# Altium PCB hdb44_passthorugh.PcbDoc
Units mm, origin at the board's own origin, x right, y up, seen from the top; angles counter-clockwise.
Board outline 52.14 x 63.25 mm, 4 copper layers (Top Layer, Int1 (GND), Int2 (GND), Bottom Layer), stack 0.5 mm thick; 46 components, 89 nets, 180 pads, 0 vias.
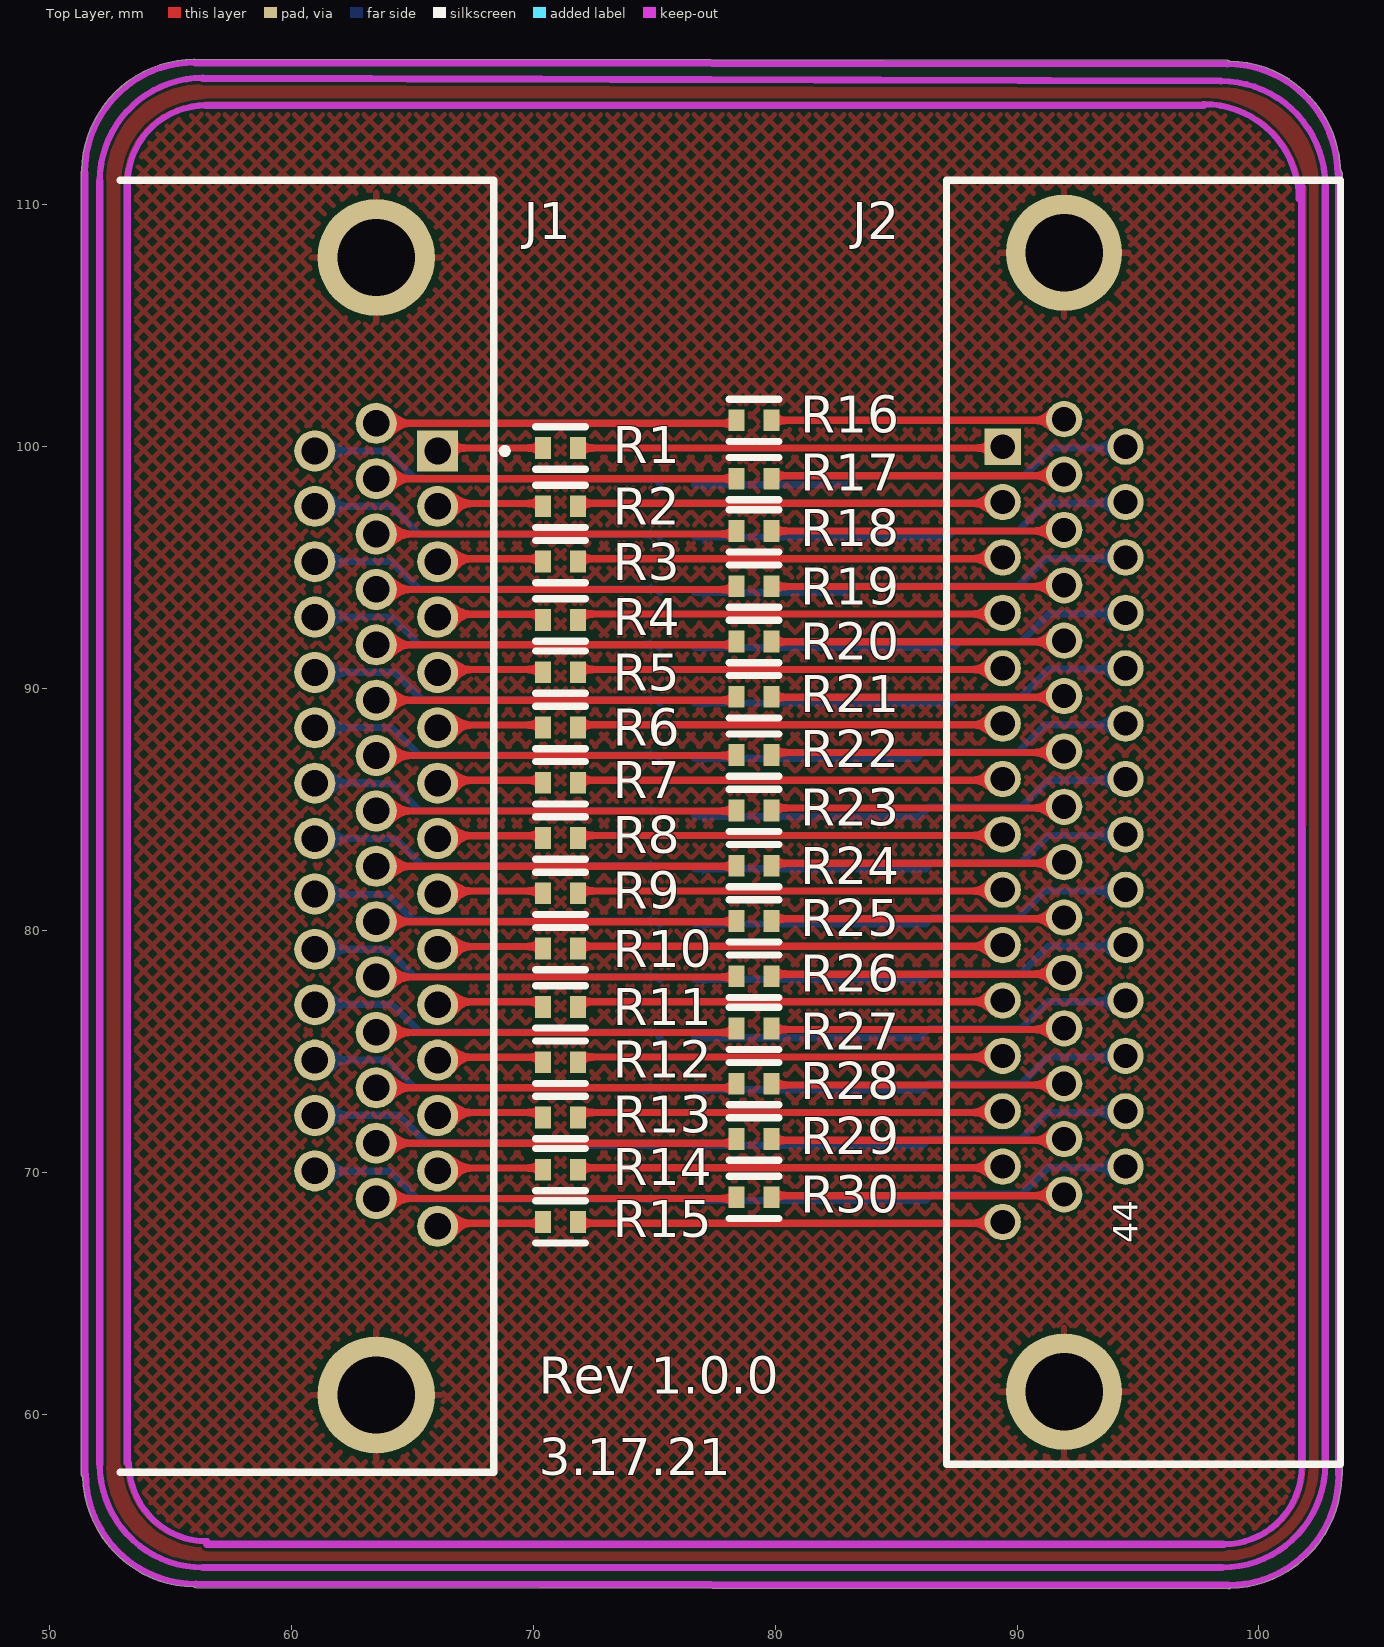
[diagram p0: Top Layer view]
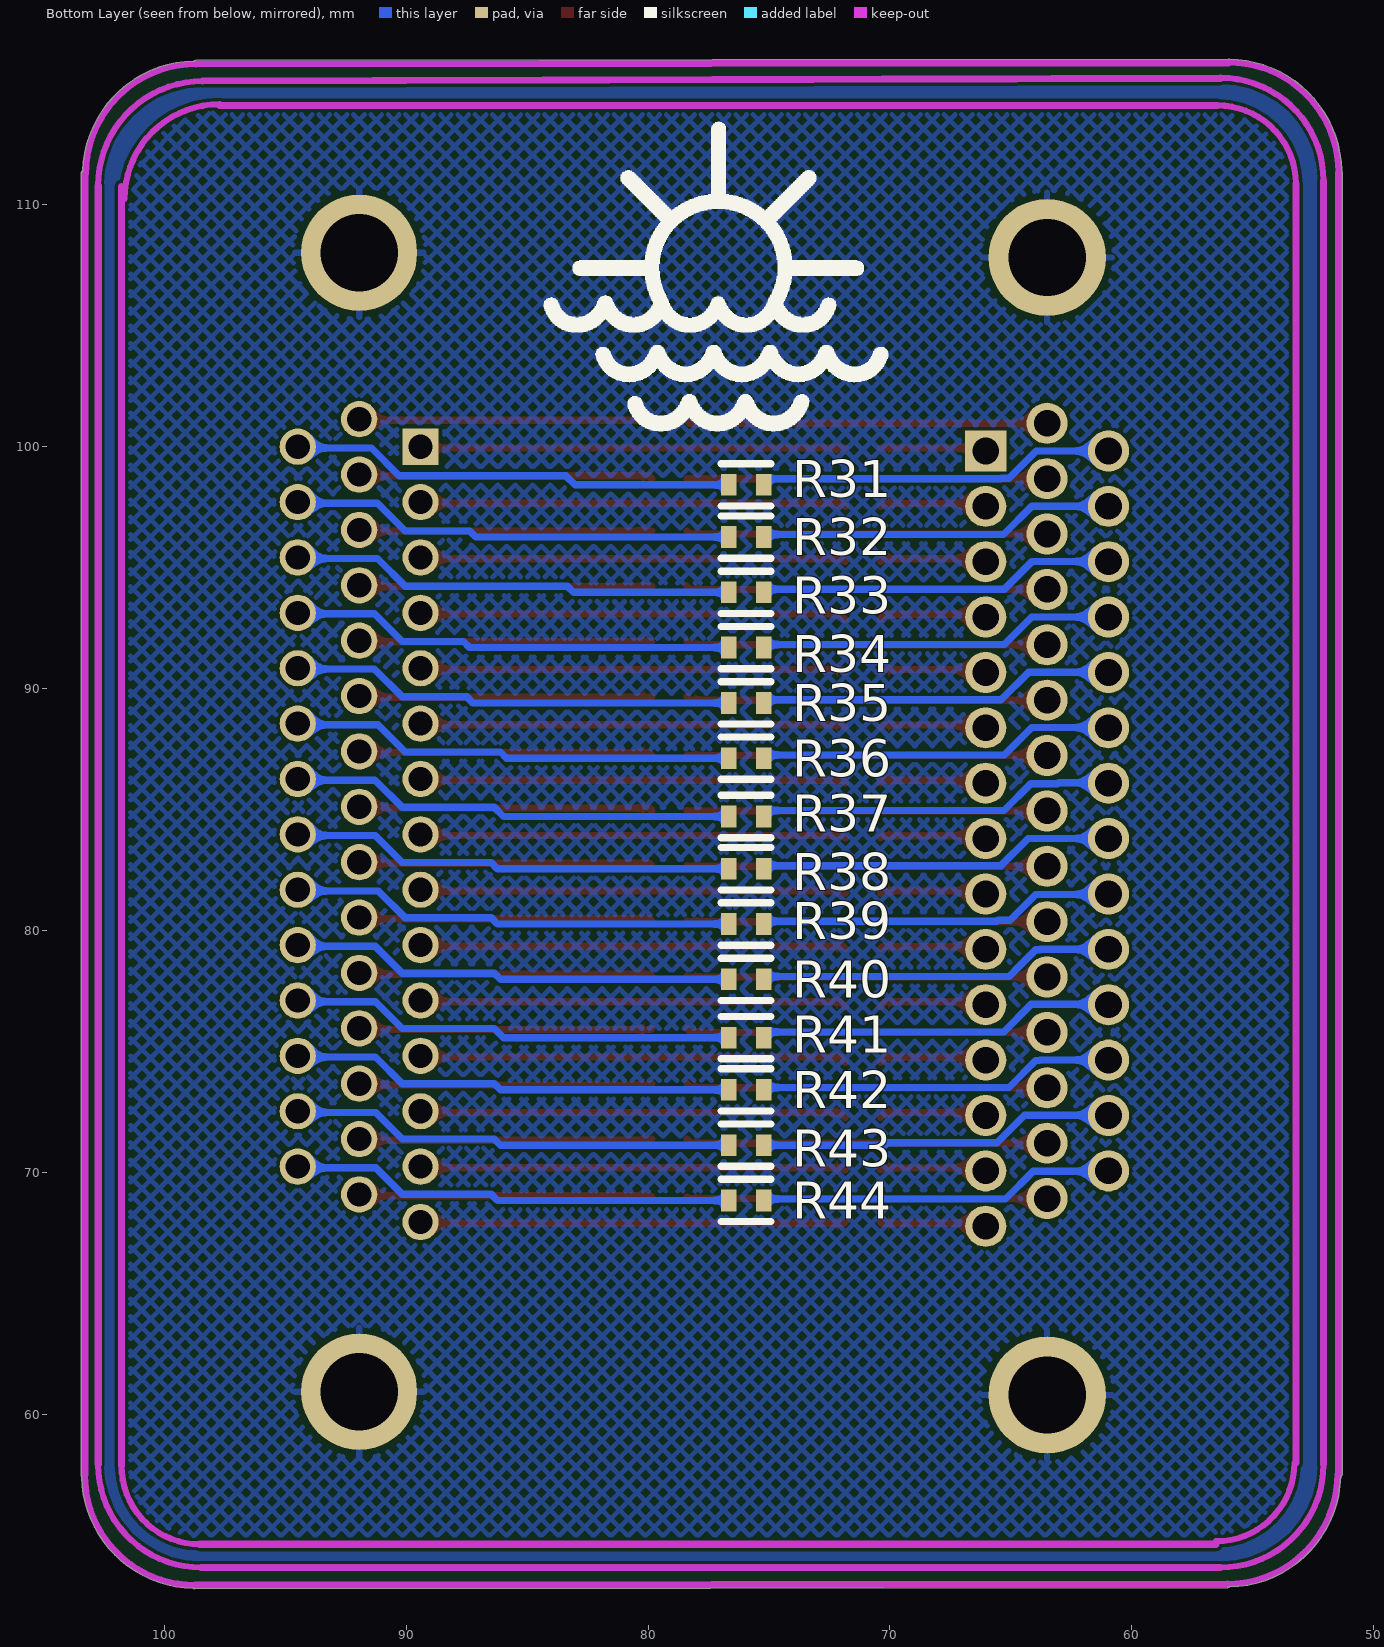
[diagram p1: Bottom Layer view, seen from below]
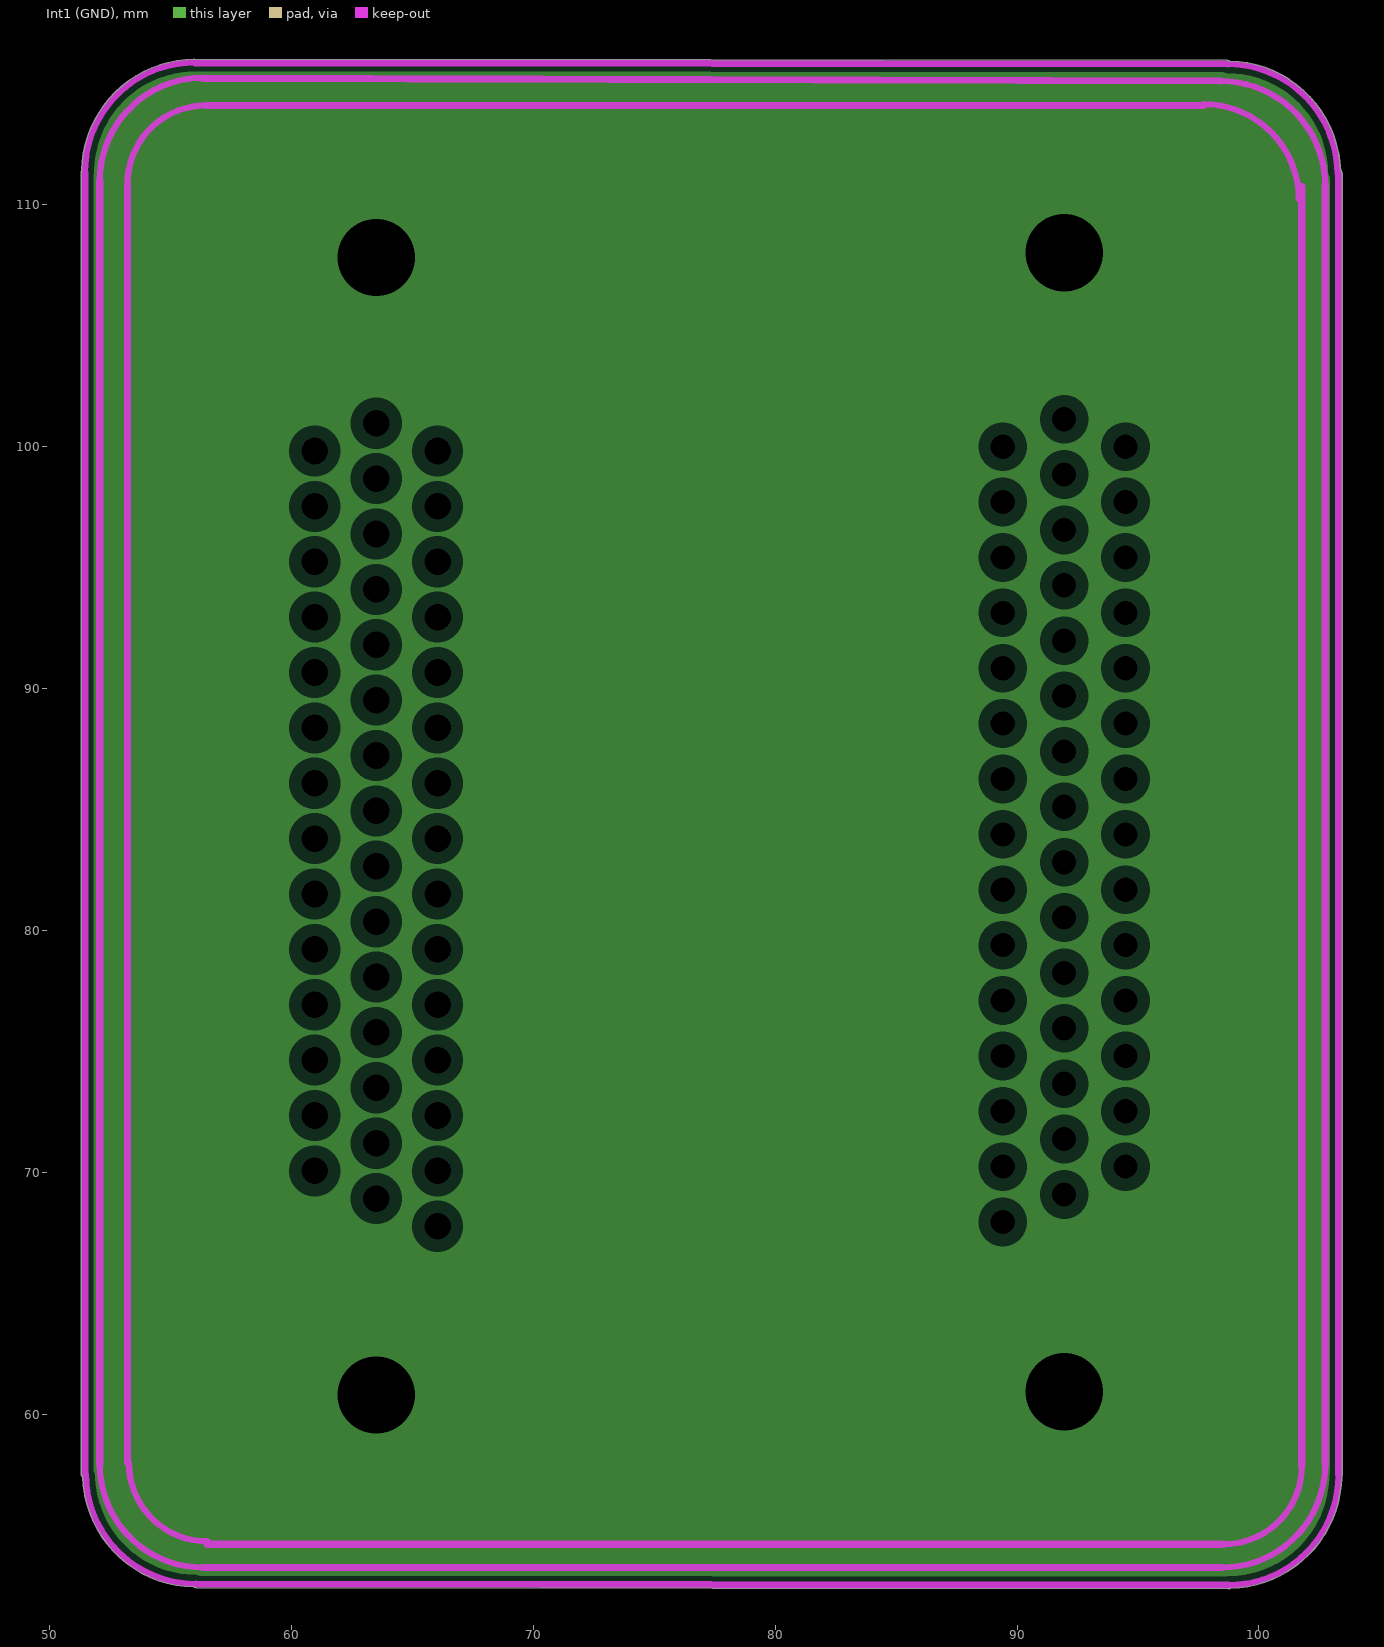
[diagram p2: Int1 (GND), clearances drawn from the general rule]
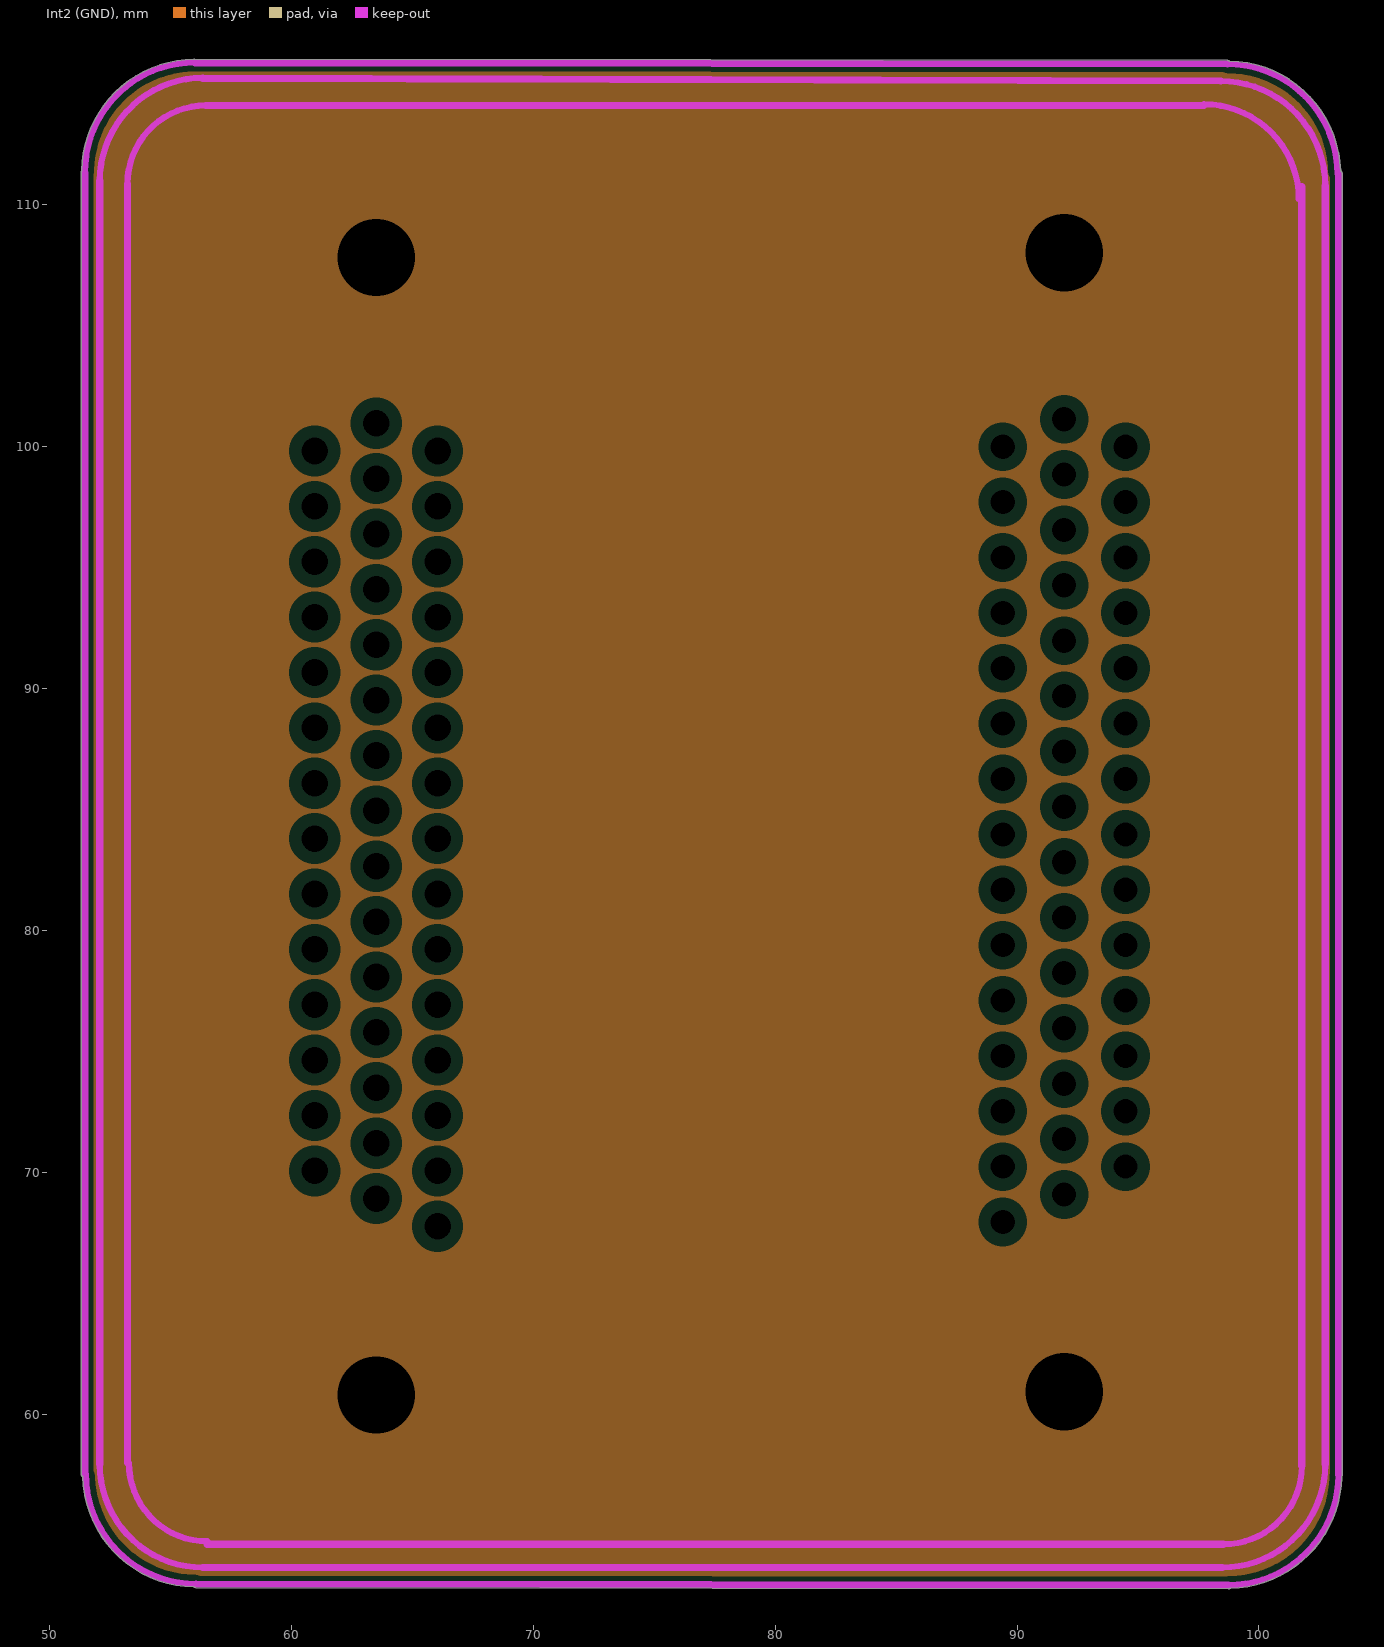
[diagram p3: Int2 (GND), clearances drawn from the general rule]
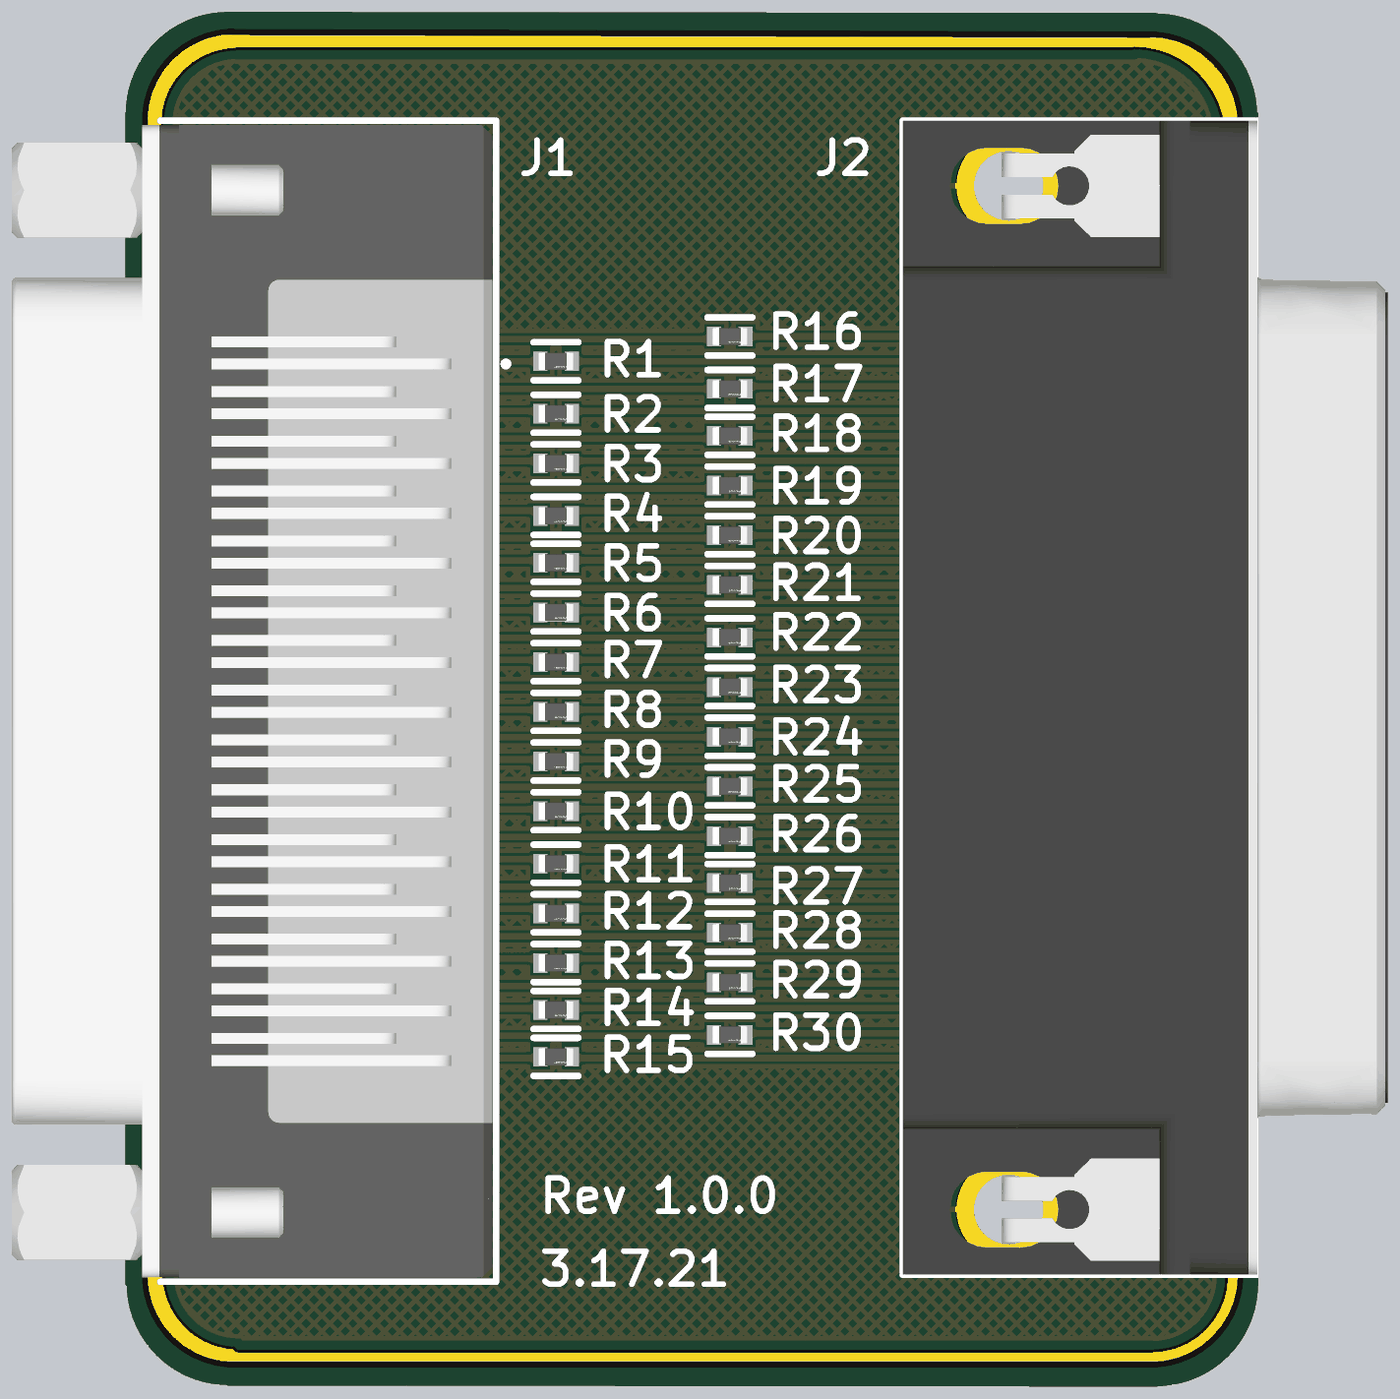
[diagram p4: 3D render of the assembled board from above, using the file's embedded part models]
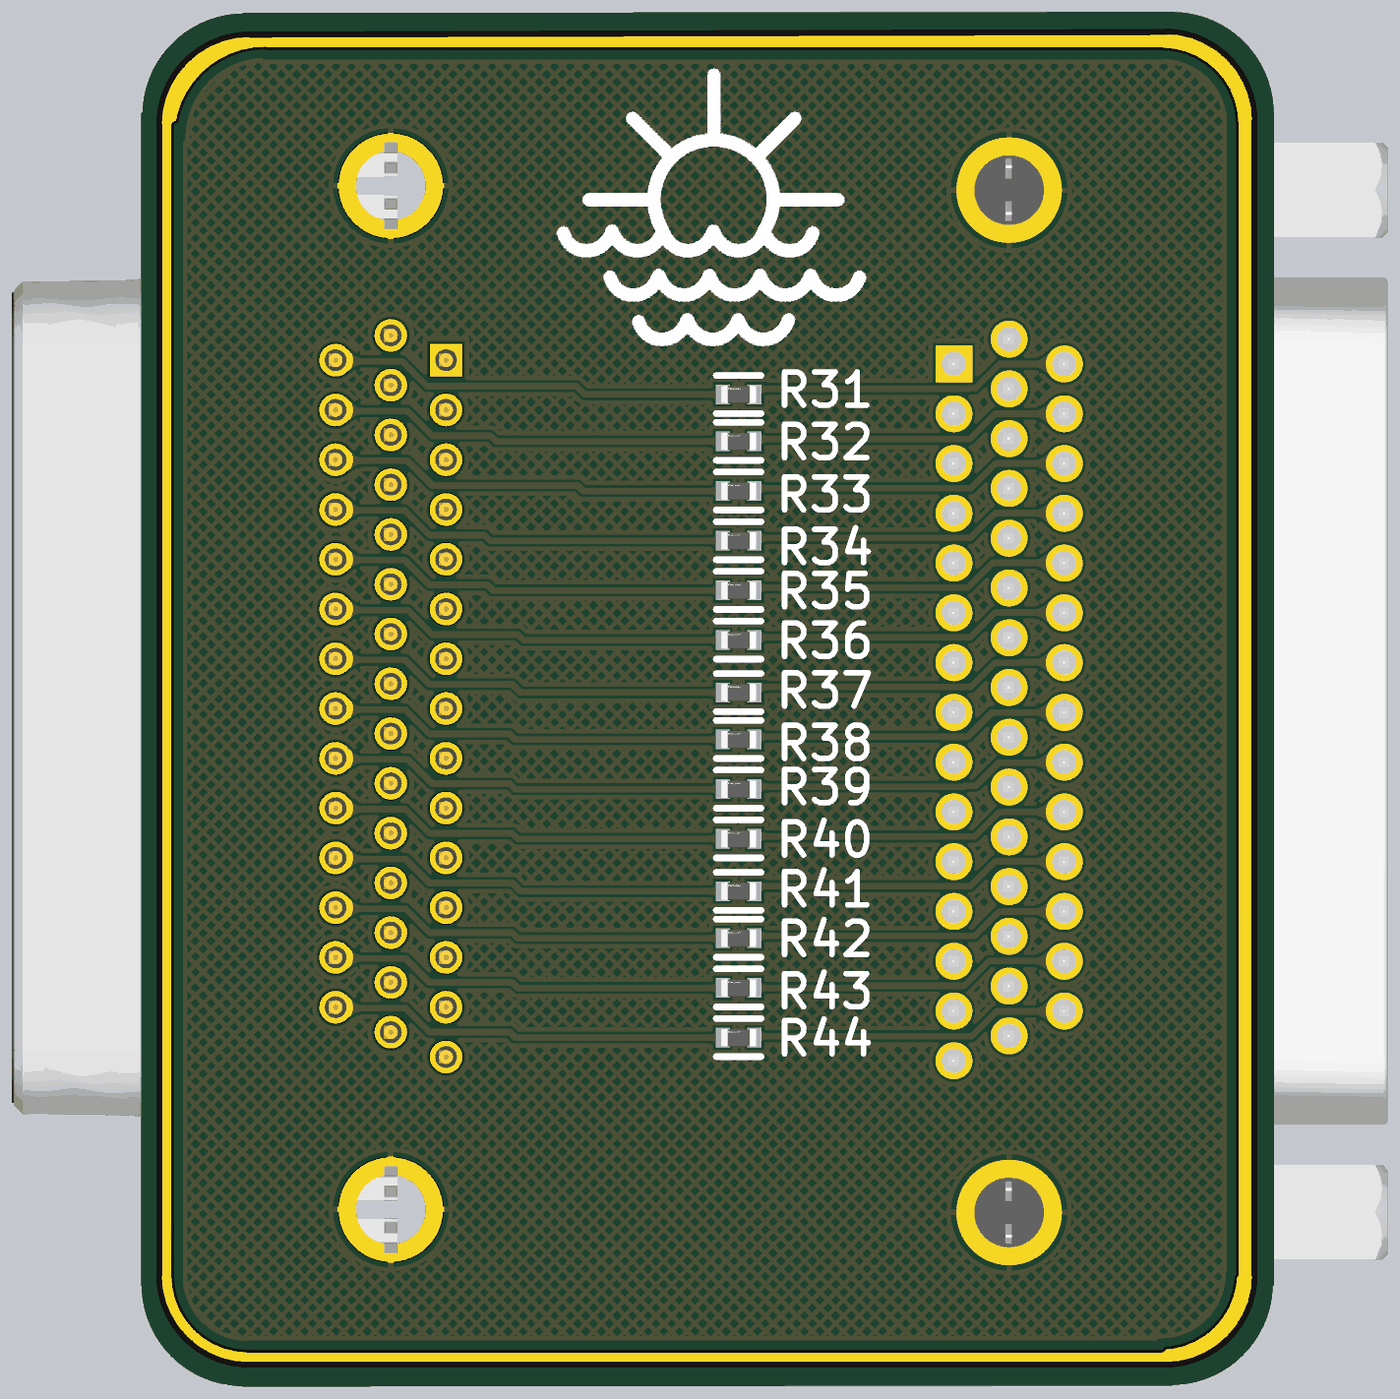
[diagram p5: 3D render of the assembled board from below, using the file's embedded part models]

## Layer stack, top to bottom
Top Solder: solder mask 0.0203, SM-001, Dk 4
Top Layer: signal copper 0.05
Dielectric 2: prepreg 0.1, 7628*1, Dk 4.3
Int1 (GND): plane copper 0.035, net GND
Dielectric 3: core 0.13, Core-039, Dk 4.6
Int2 (GND): plane copper 0.035, net GND
Dielectric 4: prepreg 0.1, 7628*1, Dk 4.3
Bottom Layer: signal copper 0.05
Bottom Solder: solder mask 0.0203, SM-001, Dk 4

## Board outline
51.367,57.403 cw(c51.452,57.527) 51.301,57.527 51.301,111.342 cw(c51.452,111.342) 51.325,111.423 cw(c56.003,111.342) 55.966,116.021 cw(c56.003,115.875) 56.003,116.025 98.7,115.975 cw(c98.7,115.824) 98.781,115.951 cw(c98.7,111.273) 103.376,111.416 cw(c103.292,111.292) 103.442,111.292 103.442,57.476 cw(c103.292,57.476) 103.418,57.395 cw(c98.741,57.476) 98.822,52.798 cw(c98.741,52.925) 98.74,52.775 56.043,52.825 cw(c56.044,52.976) 55.963,52.849 cw(c56.044,57.527)

## Design rules (kind name [scope] priority, off if disabled: settings)
Clearance [All] p1: gap=0.127 ignorepadtopadclearanceinfootprint=FALSE
HoleSize [All] p1: absolutevalues=TRUE maxlimit=5 minlimit=0.025 maxpercent=80.000 minpercent=20.000
PlaneClearance [All] p1: clearance=0.508
PlaneConnect [All] p1: planeconnectstyle=Relief reliefexpansion=0.508 reliefentries=4 reliefconductorwidth=0.254 reliefairgap=0.254
PolygonConnect [All] p1: connectstyle=Relief reliefconductorwidth=0.254 reliefentries=4 polygonreliefangle="90 Angle" airgapwidth=0.254
RoutingVias [All] p1: holewidth=0.4 width=2 viastyle="Through Hole" minholewidth=0.2 minwidth=1.27 maxholewidth=0.711 maxwidth=2.54
SolderMaskExpansion [All] p1: expansion=0.05 istentingtop=FALSE
Width [All] p1: maxlimit=0.5 minlimit=0.125 preferedwidth=0.2
27 further rules are at their usual default settings.

## Components (designator, comment, footprint, x,y, rotation, side; value= is the part's Value field where it differs from the comment)
J1 "L717HDB44PD1CH4F" FP-L717HDB44PD1CH4F-MFG 57.12,84.306 r270 top
J2 "618044325223" 618044325223 95.228,84.471 r90 top
R1 "ERJ-3GEY0R00V" FP-ERJ-3GEY0R00V-MFG 71.12,99.949 r180 top value=0Ω
R2 "ERJ-3GEY0R00V" FP-ERJ-3GEY0R00V-MFG 71.12,97.536 r180 top value=0Ω
R3 "ERJ-3GEY0R00V" FP-ERJ-3GEY0R00V-MFG 71.12,95.25 r180 top value=0Ω
R4 "ERJ-3GEY0R00V" FP-ERJ-3GEY0R00V-MFG 71.12,92.837 r180 top value=0Ω
R5 "ERJ-3GEY0R00V" FP-ERJ-3GEY0R00V-MFG 71.12,90.678 r180 top value=0Ω
R6 "ERJ-3GEY0R00V" FP-ERJ-3GEY0R00V-MFG 71.12,88.392 r180 top value=0Ω
R7 "ERJ-3GEY0R00V" FP-ERJ-3GEY0R00V-MFG 71.12,86.106 r180 top value=0Ω
R8 "ERJ-3GEY0R00V" FP-ERJ-3GEY0R00V-MFG 71.12,83.82 r180 top value=0Ω
R9 "ERJ-3GEY0R00V" FP-ERJ-3GEY0R00V-MFG 71.12,81.534 r180 top value=0Ω
R10 "ERJ-3GEY0R00V" FP-ERJ-3GEY0R00V-MFG 71.12,79.248 r180 top value=0Ω
R11 "ERJ-3GEY0R00V" FP-ERJ-3GEY0R00V-MFG 71.12,76.835 r180 top value=0Ω
R12 "ERJ-3GEY0R00V" FP-ERJ-3GEY0R00V-MFG 71.12,74.549 r180 top value=0Ω
R13 "ERJ-3GEY0R00V" FP-ERJ-3GEY0R00V-MFG 71.12,72.263 r180 top value=0Ω
R14 "ERJ-3GEY0R00V" FP-ERJ-3GEY0R00V-MFG 71.12,70.104 r180 top value=0Ω
R15 "ERJ-3GEY0R00V" FP-ERJ-3GEY0R00V-MFG 71.12,67.945 r180 top value=0Ω
R16 "ERJ-3GEY0R00V" FP-ERJ-3GEY0R00V-MFG 79.121,101.092 r180 top value=0Ω
R17 "ERJ-3GEY0R00V" FP-ERJ-3GEY0R00V-MFG 79.121,98.679 r180 top value=0Ω
R18 "ERJ-3GEY0R00V" FP-ERJ-3GEY0R00V-MFG 79.121,96.52 r180 top value=0Ω
R19 "ERJ-3GEY0R00V" FP-ERJ-3GEY0R00V-MFG 79.121,94.234 r180 top value=0Ω
R20 "ERJ-3GEY0R00V" FP-ERJ-3GEY0R00V-MFG 79.121,91.948 r180 top value=0Ω
R21 "ERJ-3GEY0R00V" FP-ERJ-3GEY0R00V-MFG 79.121,89.662 r180 top value=0Ω
R22 "ERJ-3GEY0R00V" FP-ERJ-3GEY0R00V-MFG 79.121,87.249 r180 top value=0Ω
R23 "ERJ-3GEY0R00V" FP-ERJ-3GEY0R00V-MFG 79.121,84.963 r180 top value=0Ω
R24 "ERJ-3GEY0R00V" FP-ERJ-3GEY0R00V-MFG 79.121,82.677 r180 top value=0Ω
R25 "ERJ-3GEY0R00V" FP-ERJ-3GEY0R00V-MFG 79.121,80.391 r180 top value=0Ω
R26 "ERJ-3GEY0R00V" FP-ERJ-3GEY0R00V-MFG 79.121,78.105 r180 top value=0Ω
R27 "ERJ-3GEY0R00V" FP-ERJ-3GEY0R00V-MFG 79.121,75.946 r180 top value=0Ω
R28 "ERJ-3GEY0R00V" FP-ERJ-3GEY0R00V-MFG 79.121,73.66 r180 top value=0Ω
R29 "ERJ-3GEY0R00V" FP-ERJ-3GEY0R00V-MFG 79.121,71.374 r180 top value=0Ω
R30 "ERJ-3GEY0R00V" FP-ERJ-3GEY0R00V-MFG 79.121,68.961 r180 top value=0Ω
R31 "ERJ-3GEY0R00V" FP-ERJ-3GEY0R00V-MFG 75.946,98.425 r180 bottom value=0Ω
R32 "ERJ-3GEY0R00V" FP-ERJ-3GEY0R00V-MFG 75.946,96.266 r180 bottom value=0Ω
R33 "ERJ-3GEY0R00V" FP-ERJ-3GEY0R00V-MFG 75.946,93.98 r180 bottom value=0Ω
R34 "ERJ-3GEY0R00V" FP-ERJ-3GEY0R00V-MFG 75.946,91.694 r180 bottom value=0Ω
R35 "ERJ-3GEY0R00V" FP-ERJ-3GEY0R00V-MFG 75.946,89.408 r180 bottom value=0Ω
R36 "ERJ-3GEY0R00V" FP-ERJ-3GEY0R00V-MFG 75.946,87.122 r180 bottom value=0Ω
R37 "ERJ-3GEY0R00V" FP-ERJ-3GEY0R00V-MFG 75.946,84.709 r180 bottom value=0Ω
R38 "ERJ-3GEY0R00V" FP-ERJ-3GEY0R00V-MFG 75.946,82.55 r180 bottom value=0Ω
R39 "ERJ-3GEY0R00V" FP-ERJ-3GEY0R00V-MFG 75.946,80.264 r180 bottom value=0Ω
R40 "ERJ-3GEY0R00V" FP-ERJ-3GEY0R00V-MFG 75.946,77.978 r180 bottom value=0Ω
R41 "ERJ-3GEY0R00V" FP-ERJ-3GEY0R00V-MFG 75.946,75.565 r180 bottom value=0Ω
R42 "ERJ-3GEY0R00V" FP-ERJ-3GEY0R00V-MFG 75.946,73.406 r180 bottom value=0Ω
R43 "ERJ-3GEY0R00V" FP-ERJ-3GEY0R00V-MFG 75.946,71.12 r180 bottom value=0Ω
R44 "ERJ-3GEY0R00V" FP-ERJ-3GEY0R00V-MFG 75.946,68.834 r180 bottom value=0Ω

## Footprints (in the part's own frame and the unit in brackets; to place one, negate y for a bottom-side part, rotate by r counter-clockwise, add the part's x,y. Pads: shape width x height; smd on the part's side, far side on the other; paste and mask are expansions set on the pad)
618044325223 [mm] "44 pins, right angled with Rivet"
  rect 1.5x1.5 hole 1: 1(15.53,5.82)
  round 1.5 hole 1: 2(13.24,5.82) 3(10.95,5.82) 4(8.66,5.82) 5(6.37,5.82) 6(4.08,5.82) 7(1.79,5.82) 8(-0.5,5.82) 9(-2.79,5.82) 10(-5.08,5.82) 11(-7.37,5.82) 12(-9.66,5.82) 13(-11.95,5.82) 14(-14.24,5.82) 15(-16.53,5.82) 16(16.67,3.28) 17(14.38,3.28) 18(12.09,3.28) 19(9.8,3.28) 20(7.51,3.28) 21(5.22,3.28) 22(2.93,3.28) 23(0.64,3.28) 24(-1.65,3.28) 25(-3.94,3.28) 26(-6.23,3.28) 27(-8.52,3.28) 28(-10.81,3.28) 29(-13.1,3.28) 30(-15.39,3.28) 31(15.53,0.74) 32(13.24,0.74) 33(10.95,0.74) 34(8.66,0.74) 35(6.37,0.74) 36(4.08,0.74) 37(1.79,0.74) 38(-0.5,0.74) 39(-2.79,0.74) 40(-5.08,0.74) 41(-7.37,0.74) 42(-9.66,0.74) 43(-11.95,0.74) 44(-14.24,0.74)
  round 4.8 hole 3.2: M1(-23.55,3.28) M2(23.55,3.28)
  silkscreen extent -26.55,-8.15 26.55,8.15, body extent -26.55,-14.15 26.55,8.15, height 12.65
FP-ERJ-3GEY0R00V-MFG [mm]
  rect 0.65x0.9 smd paste+0 mask+0: 1(-0.725,0) 2(0.725,0)
  silkscreen extent -1.03,-0.87 1.03,0.87, body extent -1.15,-0.58 1.15,0.58, height 0.25
FP-L717HDB44PD1CH4F-MFG [mm]
  rect 1.7x1.7 hole 1.1 paste-1000 mask+0: 1(-15.52,8.92)
  round 1.7 hole 1.1 paste-1000 mask+0: 2(-13.23,8.92) 3(-10.94,8.92) 4(-8.65,8.92) 5(-6.36,8.92) 6(-4.07,8.92) 7(-1.78,8.92) 8(0.51,8.92) 9(2.8,8.92) 10(5.09,8.92) 11(7.38,8.92) 12(9.67,8.92) 13(11.96,8.92) 14(14.25,8.92) 15(16.54,8.92) 16(-16.665,6.38) 17(-14.375,6.38) 18(-12.085,6.38) 19(-9.795,6.38) 20(-7.505,6.38) 21(-5.215,6.38) 22(-2.925,6.38) 23(-0.635,6.38) 24(1.655,6.38) 25(3.945,6.38) 26(6.235,6.38) 27(8.525,6.38) 28(10.815,6.38) 29(13.105,6.38) 30(15.395,6.38) 31(-15.52,3.84) 32(-13.23,3.84) 33(-10.94,3.84) 34(-8.65,3.84) 35(-6.36,3.84) 36(-4.07,3.84) 37(-1.78,3.84) 38(0.51,3.84) 39(2.8,3.84) 40(5.09,3.84) 41(7.38,3.84) 42(9.67,3.84) 43(11.96,3.84) 44(14.25,3.84)
  round 4.85 hole 3.2 paste-1000 mask+0: 45(-23.52,6.38) 46(23.52,6.38)
  silkscreen extent -26.71,-4.2 26.71,11.82, body extent -26.81,-11.34 26.81,11.34, height 0.25

## Part data
J1: library part CMP-02362-000001-1, "CONN DSUB HD PLUG 44POS R/A SLDR", Current Rating=3A, Max Operating Temperature=105°C, Min Operating Temperature=-55°C, Package Quantity=50, Voltage Rating=250V, Body Material=Steel, Connector Type=D-Sub, Contact Material=Brass, Contact Plating=Gold, Depth=22.22mm, Gender=Male, Housing Material=Thermoplastic, Length=53.09mm, Mount="Through Hole", Number Of Contacts=44, Number of Ports=1, Number of Positions=44, Number of Rows=3, Number of Terminals=44, Orientation="Right Angle", Packaging=Tray, Termination=Solder, Width=12.55mm
J2: library part CMP-1502-00222-1, "Female High Density PCB Connector without Hex Screw WR-DSUB, Angled, 44 pins", Contact Resistance=30mOhm, Manufacturer="Wurth Elektronik", Operating Temperature=-40to85degC, Rated Current=3A, Working Voltage=60VAC, Datasheet URL=https://katalog.we-online.de/em/datasheet/6180xx325223.pdf, Gender=Female, Manufacturer URL=http://www.we-online.de, Mounting Technology=THT, Orientation=Angled, Package Reference=618044325223, Packaging=Tray, Part Number=618044325223, Pin Number=44, Publisher=WurthElektronik
R1 R2 R3 R4 R5 R6 R7 R8 R9 R10 R11 R12 R13 R14 R15 R16 R17 R18 R19 R20 R21 R22 R23 R24 R25 R26 R27 R28 R29 R30 R31 R32 R33 R34 R35 R36 R37 R38 R39 R40 R41 R42 R43 R44: library part CMP-2000-00700-2, "RES SMD 0 OHM JUMPER 1/10W 0603", Manufacturer=Panasonic, Package=0603, Power Rating=0.1W, Resistance=0Ω, Temperature="-55°C to +155°C", Temperature Coefficient=-100/+600ppm/°C, Temperature Range High=+155°C, Temperature Range Low=-55°C, Tolerance=5%, Voltage Rating=75V, Automotive=Yes, Automotive Grade="Grade 0", Category=Res, ComponentLink2Description=Datasheet, ComponentLink2URL=https://industrial.panasonic.com/cdbs/www-data/pdf/RDA0000/AOA0000C301.pdf, Composition="Thick Film", Device Class L1="Passive Components", Device Class L2=Resistors, Device Class L3="Chip SMD Resistors", Digikey Description="RES SMD 0 OHM JUMPER 1/10W 0603", Footprint Url=https://industrial.panasonic.com/cdbs/www-data/pdf/RDA0000/DMA0000COL17.pdf, Height=0.55mm, Ipc Land Pattern Name=RESC16080X45, Lead Free=Yes, Manufacturer Part Number=ERJ-3GEY0R00V, Mouser Description="Resistor, Chip Thick Film, 0 Ohm, 0.1w, Resistor, Chip Thick Film, 0 Ohm, 0.1w, 5%", Octopart=https://octopart.com/erj-3gey0r00v-panasonic-55389238, RoHS=TRUE, Series=ERJ

## Nets (pads, with @x,y where several pads share a name; then routed paths per layer and width w, separated by ;. In a path a pad name is that pad's centre, name@x,y a point inside that pad or via, vN(x,y) a via of type N, cw(c..) or ccw(c..) an arc to the next point about the centre after c; other vN are vias at no path point)
GND: J1.45 J1.46 J2.M1 J2.M2
NetJ1_1: J1.1 R1.2 | length 4.4
  Top Layer w0.3: J1.1@66.04,99.947 70.393,99.947 R1.2
NetJ1_2: J1.2 R2.2 | length 4.4
  Top Layer w0.3: J1.2@66.04,97.657 70.274,97.657 R2.2
NetJ1_3: J1.3 R3.2 | length 4.4
  Top Layer w0.3: J1.3@66.04,95.367 70.278,95.367 R3.2
NetJ1_4: J1.4 R4.2 | length 4.5
  Top Layer w0.3: J1.4@66.04,93.077 70.197,93.077 70.395,92.879 R4.2
NetJ1_5: J1.5 R5.2 | length 4.4
  Top Layer w0.3: J1.5@66.04,90.787 70.286,90.787 R5.2
NetJ1_6: J1.6 R6.2 | length 4.4
  Top Layer w0.3: J1.6@66.04,88.497 70.29,88.497 R6.2
NetJ1_7: J1.7 R7.2 | length 4.4
  Top Layer w0.3: J1.7@66.04,86.207 70.294,86.207 R7.2
NetJ1_8: J1.8 R8.2 | length 4.4
  Top Layer w0.3: J1.8@66.04,83.917 70.298,83.917 R8.2
NetJ1_9: J1.9 R9.2 | length 4.4
  Top Layer w0.3: J1.9@66.04,81.627 70.302,81.627 R9.2
NetJ1_10: J1.10 R10.2 | length 4.4
  Top Layer w0.3: J1.10@66.04,79.337 70.306,79.337 R10.2
NetJ1_11: J1.11 R11.2 | length 4.5
  Top Layer w0.3: J1.11@66.04,77.047 70.197,77.047 70.395,76.849 R11.2
NetJ1_12: J1.12 R12.2 | length 4.4
  Top Layer w0.3: J1.12@66.04,74.757 70.197,74.757 70.395,74.559 R12.2
NetJ1_13: J1.13 R13.2 | length 4.4
  Top Layer w0.3: J1.13@66.04,72.467 70.197,72.467 70.395,72.269 R13.2
NetJ1_14: J1.14 R14.2 | length 4.4
  Top Layer w0.3: J1.14@66.04,70.177 70.322,70.177 R14.2
NetJ1_15: J1.15 R15.2 | length 4.4
  Top Layer w0.3: J1.15@66.04,67.887 70.337,67.887 R15.2
NetJ1_16: J1.16 R16.2 | length 14.9
  Top Layer w0.3: J1.16 78.275,100.971 R16.2
NetJ1_17: J1.17 R17.2 | length 14.9
  Top Layer w0.3: J1.17 63.502,98.679 R17.2
NetJ1_18: J1.18 R18.2 | length 14.9
  Top Layer w0.3: J1.18 78.267,96.391 R18.2
NetJ1_19: J1.19 R19.2 | length 15
  Top Layer w0.3: J1.19 78.263,94.101 R19.2
NetJ1_20: J1.20 R20.2 | length 15
  Top Layer w0.3: J1.20 78.259,91.811 R20.2
NetJ1_21: J1.21 R21.2 | length 15
  Top Layer w0.3: J1.21 78.255,89.521 R21.2
NetJ1_22: J1.22 R22.2 | length 14.9
  Top Layer w0.3: J1.22 78.378,87.231 R22.2
NetJ1_23: J1.23 R23.2 | length 14.9
  Top Layer w0.3: J1.23 78.374,84.941 R23.2
NetJ1_24: J1.24 R24.2 | length 14.9
  Top Layer w0.3: J1.24 78.37,82.651 R24.2
NetJ1_25: J1.25 R25.2 | length 14.9
  Top Layer w0.3: J1.25 78.366,80.361 R25.2
NetJ1_26: J1.26 R26.2 | length 14.9
  Top Layer w0.3: J1.26 78.362,78.071 R26.2
NetJ1_27: J1.27 R27.2 | length 15
  Top Layer w0.3: J1.27 78.231,75.781 R27.2
NetJ1_28: J1.28 R28.2 | length 15
  Top Layer w0.3: J1.28 78.227,73.491 R28.2
NetJ1_29: J1.29 R29.2 | length 15
  Top Layer w0.3: J1.29 78.223,71.201 R29.2
NetJ1_30: J1.30 R30.2 | length 14.9
  Top Layer w0.3: J1.30 78.346,68.911 R30.2
NetJ1_31: J1.31 R31.2 | length 14.9
  Bottom Layer w0.3: J1.31 63.949,99.826 64.339,99.436 65.075,98.699 65.385,98.699 65.405,98.679 75.046,98.679 75.221,98.504 R31.2
NetJ1_32: J1.32 R32.2 | length 14.8
  Bottom Layer w0.3: J1.32 64.135,97.536 65.3,96.371 65.571,96.371 65.573,96.373 66.507,96.373 66.509,96.371 75.116,96.371 R32.2
NetJ1_33: J1.33 R33.2 | length 14.8
  Bottom Layer w0.3: J1.33 60.964,95.25 64.135,95.25 65.278,94.107 75.094,94.107 R33.2
NetJ1_34: J1.34 R34.2 | length 14.8
  Bottom Layer w0.3: J1.34 60.968,92.964 64.135,92.964 65.278,91.821 75.094,91.821 R34.2
NetJ1_35: J1.35 R35.2 | length 14.8
  Bottom Layer w0.3: J1.35 60.972,90.678 64.262,90.678 65.405,89.535 75.094,89.535 R35.2
NetJ1_36: J1.36 R36.2 | length 14.8
  Bottom Layer w0.3: J1.36 60.976,88.392 64.135,88.392 65.278,87.249 75.094,87.249 R36.2
NetJ1_37: J1.37 R37.2 | length 14.9
  Bottom Layer w0.3: J1.37 60.98,86.106 63.031,86.106 63.069,86.068 64.173,86.068 65.28,84.961 65.571,84.961 65.573,84.959 66.507,84.959 66.509,84.961 75.046,84.961 75.221,84.786 R37.2
NetJ1_38: J1.38 R38.2 | length 14.8
  Bottom Layer w0.3: J1.38 64.286,83.796 65.413,82.669 66.506,82.669 66.514,82.677 75.094,82.677 R38.2
NetJ1_39: J1.39 R39.2 | length 14.8
  Bottom Layer w0.3: J1.39 60.978,81.488 63.07,81.488 63.967,81.488 65.035,80.42 65.532,80.42 65.573,80.379 75.106,80.379 R39.2
NetJ1_40: J1.40 R40.2 | length 14.8
  Bottom Layer w0.3: J1.40 63.786,79.216 63.805,79.197 63.967,79.197 64.627,78.538 64.627,78.535 65.073,78.089 75.11,78.089 R40.2
NetJ1_41: J1.41 R41.2 | length 14.9
  Bottom Layer w0.3: J1.41 60.978,76.944 64.153,76.944 65.296,75.801 65.571,75.801 65.573,75.799 66.507,75.799 66.509,75.801 75.046,75.801 75.221,75.626 R41.2
NetJ1_42: J1.42 R42.2 | length 14.8
  Bottom Layer w0.3: J1.42 63.794,74.636 63.812,74.618 63.967,74.618 65.079,73.506 75.121,73.506 R42.2
NetJ1_43: J1.43 R43.2 | length 14.8
  Bottom Layer w0.3: J1.43 60.972,72.358 64.435,72.358 65.573,71.219 70.101,71.219 70.2,71.12 R43.2
NetJ1_44: J1.44 R44.2 | length 14.8
  Bottom Layer w0.3: J1.44 60.978,70.038 64.074,70.038 65.221,68.891 65.571,68.891 65.573,68.893 66.507,68.893 66.509,68.891 75.046,68.891 75.103,68.834 R44.2
NetJ2_1: J2.1 R1.1 | length 16.9
  Top Layer w0.3: R1.1 88.77,99.949 J2.1@88.773,99.952
NetJ2_2: J2.2 R2.1 | length 17
  Top Layer w0.3: R2.1 71.971,97.662 J2.2@88.773,97.662
NetJ2_3: J2.3 R3.1 | length 17
  Top Layer w0.3: R3.1 71.967,95.372 J2.3@88.773,95.372
NetJ2_4: J2.4 R4.1 | length 17
  Top Layer w0.3: R4.1 71.845,92.857 72.07,93.082 J2.4@88.773,93.082
NetJ2_5: J2.5 R5.1 | length 17
  Top Layer w0.3: R5.1 71.959,90.792 J2.5@88.773,90.792
NetJ2_6: J2.6 R6.1 | length 17
  Top Layer w0.3: R6.1 71.955,88.502 J2.6@88.773,88.502
NetJ2_7: J2.7 R7.1 | length 17
  Top Layer w0.3: R7.1 71.951,86.212 J2.7@88.773,86.212
NetJ2_8: J2.8 R8.1 | length 17
  Top Layer w0.3: R8.1 71.947,83.922 J2.8@88.773,83.922
NetJ2_9: J2.9 R9.1 | length 17
  Top Layer w0.3: R9.1 71.943,81.632 J2.9@88.773,81.632
NetJ2_10: J2.10 R10.1 | length 17
  Top Layer w0.3: R10.1 71.939,79.342 J2.10@88.773,79.342
NetJ2_11: J2.11 R11.1 | length 17
  Top Layer w0.3: R11.1 72.062,77.052 J2.11@88.773,77.052
NetJ2_12: J2.12 R12.1 | length 17
  Top Layer w0.3: R12.1 72.058,74.762 J2.12@88.773,74.762
NetJ2_13: J2.13 R13.1 | length 17
  Top Layer w0.3: R13.1 72.054,72.472 J2.13@88.773,72.472
NetJ2_14: J2.14 R14.1 | length 17
  Top Layer w0.3: R14.1 71.923,70.182 J2.14@88.773,70.182
NetJ2_15: J2.15 R15.1 | length 16.9
  Top Layer w0.3: R15.1 71.898,67.892 J2.15@88.773,67.892
NetJ2_16: J2.16 R16.1 | length 11.5
  Top Layer w0.3: R16.1 J2.16@91.313,101.092
NetJ2_17: J2.17 R17.1 | length 11.5
  Top Layer w0.3: R17.1 79.969,98.802 J2.17@91.313,98.802
NetJ2_18: J2.18 R18.1 | length 11.5
  Top Layer w0.3: R18.1 79.854,96.512 J2.18@91.313,96.512
NetJ2_19: J2.19 R19.1 | length 11.5
  Top Layer w0.3: R19.1 79.858,94.222 J2.19@91.313,94.222
NetJ2_20: J2.20 R20.1 | length 11.5
  Top Layer w0.3: R20.1 79.862,91.932 J2.20@91.313,91.932
NetJ2_21: J2.21 R21.1 | length 11.5
  Top Layer w0.3: R21.1 79.866,89.642 J2.21@91.313,89.642
NetJ2_22: J2.22 R22.1 | length 11.5
  Top Layer w0.3: R22.1 79.949,87.352 J2.22@91.313,87.352
NetJ2_23: J2.23 R23.1 | length 11.5
  Top Layer w0.3: R23.1 79.945,85.062 J2.23@91.313,85.062
NetJ2_24: J2.24 R24.1 | length 11.5
  Top Layer w0.3: R24.1 79.941,82.772 J2.24@91.313,82.772
NetJ2_25: J2.25 R25.1 | length 11.5
  Top Layer w0.3: R25.1 79.937,80.482 J2.25@91.313,80.482
NetJ2_26: J2.26 R26.1 | length 11.5
  Top Layer w0.3: R26.1 79.933,78.192 J2.26@91.313,78.192
NetJ2_27: J2.27 R27.1 | length 11.5
  Top Layer w0.3: R27.1 79.89,75.902 J2.27@91.313,75.902
NetJ2_28: J2.28 R28.1 | length 11.5
  Top Layer w0.3: R28.1 79.894,73.612 J2.28@91.313,73.612
NetJ2_29: J2.29 R29.1 | length 11.5
  Top Layer w0.3: R29.1 79.898,71.322 J2.29@91.313,71.322
NetJ2_30: J2.30 R30.1 | length 11.5
  Top Layer w0.3: R30.1 79.917,69.032 J2.30@91.313,69.032
NetJ2_31: J2.31 R31.1 | length 17.8
  Bottom Layer w0.3: R31.1 83.025,98.425 83.406,98.806 90.297,98.806 91.443,99.952 J2.31@93.853,99.952
NetJ2_32: J2.32 R32.1 | length 17.8
  Bottom Layer w0.3: R32.1 87.122,96.266 87.376,96.52 90.043,96.52 91.186,97.663 93.852,97.663 J2.32@93.853,97.662
NetJ2_33: J2.33 R33.1 | length 17.8
  Bottom Layer w0.3: R33.1 83.089,93.98 83.343,94.234 90.043,94.234 91.186,95.377 93.848,95.377 J2.33@93.853,95.372
NetJ2_34: J2.34 R34.1 | length 17.8
  Bottom Layer w0.3: R34.1 87.376,91.694 87.63,91.948 90.17,91.948 91.313,93.091 93.844,93.091 J2.34@93.853,93.082
NetJ2_35: J2.35 R35.1 | length 17.8
  Bottom Layer w0.3: R35.1 87.249,89.408 87.503,89.662 90.17,89.662 91.313,90.805 93.84,90.805 J2.35@93.853,90.792
NetJ2_36: J2.36 R36.1 | length 17.8
  Bottom Layer w0.3: R36.1 85.852,87.122 86.106,87.376 90.043,87.376 91.169,88.502 J2.36@93.853,88.502
NetJ2_37: J2.37 R37.1 | length 17.8
  Bottom Layer w0.3: R37.1 85.979,84.709 86.36,85.09 90.17,85.09 91.292,86.212 J2.37@93.853,86.212
NetJ2_38: J2.38 R38.1 | length 17.8
  Bottom Layer w0.3: R38.1 86.233,82.55 86.487,82.804 90.17,82.804 91.288,83.922 J2.38@93.853,83.922
NetJ2_39: J2.39 R39.1 | length 17.7
  Bottom Layer w0.3: R39.1 86.233,80.264 86.487,80.518 90.043,80.518 91.157,81.632 J2.39@93.853,81.632
NetJ2_40: J2.40 R40.1 | length 17.7
  Bottom Layer w0.3: R40.1 86.106,77.978 86.36,78.232 90.17,78.232 91.28,79.342 J2.40@93.853,79.342
NetJ2_41: J2.41 R41.1 | length 17.8
  Bottom Layer w0.3: R41.1 85.979,75.565 86.36,75.946 90.17,75.946 91.276,77.052 J2.41@93.853,77.052
NetJ2_42: J2.42 R42.1 | length 17.7
  Bottom Layer w0.3: R42.1 86.106,73.406 86.36,73.66 90.17,73.66 91.272,74.762 J2.42@93.853,74.762
NetJ2_43: J2.43 R43.1 | length 17.7
  Bottom Layer w0.3: R43.1 86.106,71.12 86.36,71.374 90.17,71.374 91.268,72.472 J2.43@93.853,72.472
NetJ2_44: J2.44 R44.1 | length 17.7
  Bottom Layer w0.3: R44.1 86.233,68.834 86.487,69.088 90.17,69.088 91.264,70.182 J2.44@93.853,70.182

## Polygon pours and split planes (outlines as drawn)
GND on Bottom Layer "GND_L04_P005" (hatched 45Degree grid 0.508 track 0.203, pour order 5): 53.148,57.843 cw(c53.213,57.978) 53.062,57.978 53.063,110.873 cw(c53.213,110.873) 53.087,110.954 cw(c56.454,110.873) 56.373,114.24 cw(c56.454,114.114) 56.454,114.264 97.648,114.263 cw(c97.728,114.163) 97.728,114.291 cw(c97.728,110.24) 101.726,110.891 cw(c101.778,110.75) 101.928,110.75 101.928,57.855 cw(c101.778,57.855) 101.904,57.774 cw(c98.537,57.855) 98.618,54.488 cw(c98.537,54.614) 98.537,54.464 56.513,54.465 cw(c56.513,54.615) 56.363,54.613 cw(c56.513,57.978)
GND on Bottom Layer "GND_L04_P001" (solid, pour order 1): 52.07,57.912 52.07,110.998 cw(c56.329,110.998) 56.329,115.257 56.329,115.239 98.425,115.121 cw(c98.425,110.803) 102.743,110.803 102.743,57.912 cw(c98.484,57.912) 98.484,53.653 56.329,53.653 cw(c56.329,57.912)
GND on Top Layer "GND_L01_P004" (hatched 45Degree grid 0.508 track 0.203, pour order 4): 53.148,57.843 cw(c53.213,57.978) 53.062,57.978 53.063,110.873 cw(c53.213,110.873) 53.087,110.954 cw(c56.454,110.873) 56.373,114.24 cw(c56.454,114.114) 56.454,114.264 97.648,114.263 cw(c97.728,114.163) 97.728,114.291 cw(c97.728,110.24) 101.726,110.891 cw(c101.778,110.75) 101.928,110.75 101.928,57.855 cw(c101.778,57.855) 101.904,57.774 cw(c98.537,57.855) 98.618,54.488 cw(c98.537,54.614) 98.537,54.464 56.513,54.465 cw(c56.513,54.615) 56.363,54.613 cw(c56.513,57.978)
GND on Top Layer "GND_L01_P003" (hatched Horizontal grid 0.508 track 0.203, pour order 3): 53.148,57.843 cw(c53.213,57.978) 53.062,57.978 53.063,110.873 cw(c53.213,110.873) 53.087,110.954 cw(c56.454,110.873) 56.373,114.24 cw(c56.454,114.114) 56.454,114.264 97.648,114.263 cw(c97.728,114.163) 97.728,114.291 cw(c97.728,110.24) 101.726,110.891 cw(c101.778,110.75) 101.928,110.75 101.928,57.855 cw(c101.778,57.855) 101.904,57.774 cw(c98.537,57.855) 98.618,54.488 cw(c98.537,54.614) 98.537,54.464 56.513,54.465 cw(c56.513,54.615) 56.363,54.613 cw(c56.513,57.978)
GND on Top Layer "GND_L01_P000" (solid, pour order 0): 52.07,57.912 52.07,110.998 cw(c56.329,110.998) 56.329,115.257 56.329,115.239 98.425,115.121 cw(c98.425,110.803) 102.743,110.803 102.743,57.912 cw(c98.484,57.912) 98.484,53.653 56.329,53.653 cw(c56.329,57.912)
no net on Bottom Solder "NONET_L01_P-001" (solid): 52.07,57.912 52.07,110.998 cw(c56.329,110.998) 56.329,115.257 56.329,115.239 98.425,115.121 cw(c98.425,110.803) 102.743,110.803 102.743,57.912 cw(c98.484,57.912) 98.484,53.653 56.329,53.653 cw(c56.329,57.912)
no net on Top Solder "NONET_L01_P-001" (solid): 52.07,57.912 52.07,110.998 cw(c56.329,110.998) 56.329,115.257 56.329,115.239 98.425,115.121 cw(c98.425,110.803) 102.743,110.803 102.743,57.912 cw(c98.484,57.912) 98.484,53.653 56.329,53.653 cw(c56.329,57.912)
GND on Int2 (GND) (split plane): 56.013,115.515 56.002,115.514 56.013,115.515
GND on Int2 (GND) (split plane): 98.628,115.464 98.699,115.435 98.699,115.449 98.772,115.441 98.778,115.441 98.781,115.44 98.782,115.441 98.973,115.434 99.244,115.408 99.513,115.363 99.779,115.301 100.04,115.222 100.296,115.126 100.544,115.013 100.785,114.885 101.017,114.741 101.239,114.582 101.449,114.408 101.649,114.222 101.835,114.023 102.008,113.812 102.167,113.59 102.311,113.358 102.44,113.118 102.553,112.869 102.649,112.614 102.728,112.352 102.79,112.087 102.834,111.817 102.861,111.546 102.866,111.401 102.867,111.401 102.876,111.317 102.905,111.221 102.932,111.17 102.932,57.548 102.902,57.476 102.916,57.476 102.909,57.404 102.908,57.398 102.908,57.395 102.908,57.394 102.902,57.203 102.875,56.932 102.831,56.663 102.769,56.397 102.69,56.136 102.593,55.88 102.481,55.632 102.352,55.391 102.208,55.159 102.049,54.937 101.876,54.727 101.689,54.527 101.49,54.341 101.279,54.168 101.058,54.009 100.826,53.865 100.585,53.736 100.337,53.623 100.081,53.527 99.82,53.448 99.554,53.386 99.285,53.342 99.013,53.315 98.823,53.309 98.822,53.309 98.819,53.308 98.813,53.308 98.741,53.301 98.741,53.315 98.669,53.285 56.116,53.336 56.044,53.365 56.044,53.351 55.971,53.359 55.966,53.359 55.963,53.359 55.961,53.359 55.771,53.366 55.499,53.392 55.23,53.437 54.964,53.499 54.703,53.578 54.448,53.674 54.199,53.787 53.959,53.915 53.727,54.059 53.505,54.218 53.294,54.392 53.095,54.578 52.908,54.777 52.735,54.988 52.576,55.21 52.432,55.442 52.303,55.682 52.191,55.931 52.095,56.186 52.016,56.448 51.954,56.713 51.909,56.983 51.882,57.254 51.877,57.416 51.876,57.416 51.867,57.502 51.838,57.598 51.812,57.648 51.812,111.271 51.842,111.342 51.828,111.342 51.835,111.415 51.835,111.42 51.835,111.423 51.835,111.425 51.842,111.615 51.868,111.887 51.913,112.156 51.975,112.422 52.054,112.683 52.15,112.938 52.263,113.187 52.391,113.427 52.535,113.659 52.694,113.881 52.868,114.092 53.054,114.291 53.253,114.478 53.464,114.651 53.686,114.81 53.918,114.954 54.158,115.083 54.407,115.195 54.662,115.291 54.924,115.37 55.189,115.432 55.459,115.477 55.73,115.504 55.958,115.511 55.966,115.51 56.002,115.514 56.002,115.485 56.003,115.485 56.074,115.515
GND on Int1 (GND) (split plane): 56.013,115.515 56.002,115.514 56.013,115.515
GND on Int1 (GND) (split plane): 98.628,115.464 98.699,115.435 98.699,115.449 98.772,115.441 98.778,115.441 98.781,115.44 98.782,115.441 98.973,115.434 99.244,115.408 99.513,115.363 99.779,115.301 100.04,115.222 100.296,115.126 100.544,115.013 100.785,114.885 101.017,114.741 101.239,114.582 101.449,114.408 101.649,114.222 101.835,114.023 102.008,113.812 102.167,113.59 102.311,113.358 102.44,113.118 102.553,112.869 102.649,112.614 102.728,112.352 102.79,112.087 102.834,111.817 102.861,111.546 102.866,111.401 102.867,111.401 102.876,111.317 102.905,111.221 102.932,111.17 102.932,57.548 102.902,57.476 102.916,57.476 102.909,57.404 102.908,57.398 102.908,57.395 102.908,57.394 102.902,57.203 102.875,56.932 102.831,56.663 102.769,56.397 102.69,56.136 102.593,55.88 102.481,55.632 102.352,55.391 102.208,55.159 102.049,54.937 101.876,54.727 101.689,54.527 101.49,54.341 101.279,54.168 101.058,54.009 100.826,53.865 100.585,53.736 100.337,53.623 100.081,53.527 99.82,53.448 99.554,53.386 99.285,53.342 99.013,53.315 98.823,53.309 98.822,53.309 98.819,53.308 98.813,53.308 98.741,53.301 98.741,53.315 98.669,53.285 56.116,53.336 56.044,53.365 56.044,53.351 55.971,53.359 55.966,53.359 55.963,53.359 55.961,53.359 55.771,53.366 55.499,53.392 55.23,53.437 54.964,53.499 54.703,53.578 54.448,53.674 54.199,53.787 53.959,53.915 53.727,54.059 53.505,54.218 53.294,54.392 53.095,54.578 52.908,54.777 52.735,54.988 52.576,55.21 52.432,55.442 52.303,55.682 52.191,55.931 52.095,56.186 52.016,56.448 51.954,56.713 51.909,56.983 51.882,57.254 51.877,57.416 51.876,57.416 51.867,57.502 51.838,57.598 51.812,57.648 51.812,111.271 51.842,111.342 51.828,111.342 51.835,111.415 51.835,111.42 51.835,111.423 51.835,111.425 51.842,111.615 51.868,111.887 51.913,112.156 51.975,112.422 52.054,112.683 52.15,112.938 52.263,113.187 52.391,113.427 52.535,113.659 52.694,113.881 52.868,114.092 53.054,114.291 53.253,114.478 53.464,114.651 53.686,114.81 53.918,114.954 54.158,115.083 54.407,115.195 54.662,115.291 54.924,115.37 55.189,115.432 55.459,115.477 55.73,115.504 55.958,115.511 55.966,115.51 56.002,115.514 56.002,115.485 56.003,115.485 56.074,115.515

## Keep-outs
Keep-Out Layer:
  lines w0.254: 51.452,111.342 cw(c56.003,111.342) 56.003,115.893 ; 51.493,57.527 ccw(c56.044,57.527) 56.044,52.976 ; 52.07,57.912 ccw(c56.329,57.912) 56.329,53.653 ; 52.07,110.998 cw(c56.329,110.998) 56.329,115.257 ; 53.213,110.873 cw(c56.454,110.873) 56.454,114.114 ; 53.272,57.978 ccw(c56.513,57.978) 56.513,54.737 ; 97.728,114.163 cw(c97.728,110.24) 101.651,110.24 ; 98.425,115.121 cw(c98.425,110.803) 102.743,110.803 ; 98.484,53.653 ccw(c98.484,57.912) 102.743,57.912 ; 98.537,54.614 ccw(c98.537,57.855) 101.778,57.855 ; 98.7,115.824 cw(c98.7,111.273) 103.251,111.273 ; 98.741,52.925 ccw(c98.741,57.476) 103.292,57.476
  lines w0.3: 51.452,57.527 51.452,111.342 ; 52.07,57.912 52.07,110.998 ; 53.213,57.978 53.213,110.873 ; 56.003,115.875 98.7,115.824 ; 56.044,52.976 98.741,52.925 ; 56.329,53.653 98.484,53.653 ; 56.329,115.239 98.425,115.121 ; 56.454,114.114 97.728,114.112 ; 56.513,54.615 98.537,54.614 ; 101.778,57.855 101.778,110.75 ; 102.743,57.912 102.743,110.803 ; 103.292,57.476 103.292,111.292

## Silkscreen, mask and mechanical layers (free items; w line width, h text height)
Top Overlay:
  text "Rev 1.0.0" at 70.231,60.833 h1.52
  text "3.17.21" at 70.231,57.473 h1.52
Bottom Overlay:
  drawing of 3 lines, arcs and shapes, not listed
Top Solder:
  pour cut-out: 53.148,57.843 cw(c53.213,57.978) 53.062,57.978 53.063,110.873 cw(c53.213,110.873) 53.087,110.954 cw(c56.454,110.873) 56.373,114.24 cw(c56.454,114.114) 56.454,114.264 97.648,114.263 cw(c97.728,114.163) 97.728,114.291 cw(c97.728,110.24) 101.726,110.891 cw(c101.778,110.75) 101.928,110.75 101.928,57.855 cw(c101.778,57.855) 101.904,57.774 cw(c98.537,57.855) 98.618,54.488 cw(c98.537,54.614) 98.537,54.464 56.513,54.465 cw(c56.513,54.615) 56.363,54.613 cw(c56.513,57.978)
Bottom Solder:
  pour cut-out: 53.148,57.843 cw(c53.213,57.978) 53.062,57.978 53.063,110.873 cw(c53.213,110.873) 53.087,110.954 cw(c56.454,110.873) 56.373,114.24 cw(c56.454,114.114) 56.454,114.264 97.648,114.263 cw(c97.728,114.163) 97.728,114.291 cw(c97.728,110.24) 101.726,110.891 cw(c101.778,110.75) 101.928,110.75 101.928,57.855 cw(c101.778,57.855) 101.904,57.774 cw(c98.537,57.855) 98.618,54.488 cw(c98.537,54.614) 98.537,54.464 56.513,54.465 cw(c56.513,54.615) 56.363,54.613 cw(c56.513,57.978)

## Text inside footprints (layer, text, board x,y; h text height)
J2: Top Overlay "44" at 94.996,67.056 h1.02 r90; Mechanical 2 "PCB Edge" at 104.848,80.371 h1.02 r90